# Altium PCB PCB.PcbDoc (part 1 of 6)
Units mm, origin at the board's own origin, x right, y up, seen from the top; angles counter-clockwise.
Board outline 56.61 x 57.68 mm, 2 copper layers (Top Layer, Bottom Layer), stack 0.572 mm thick; 104 components, 100 nets, 551 pads, 332 vias.
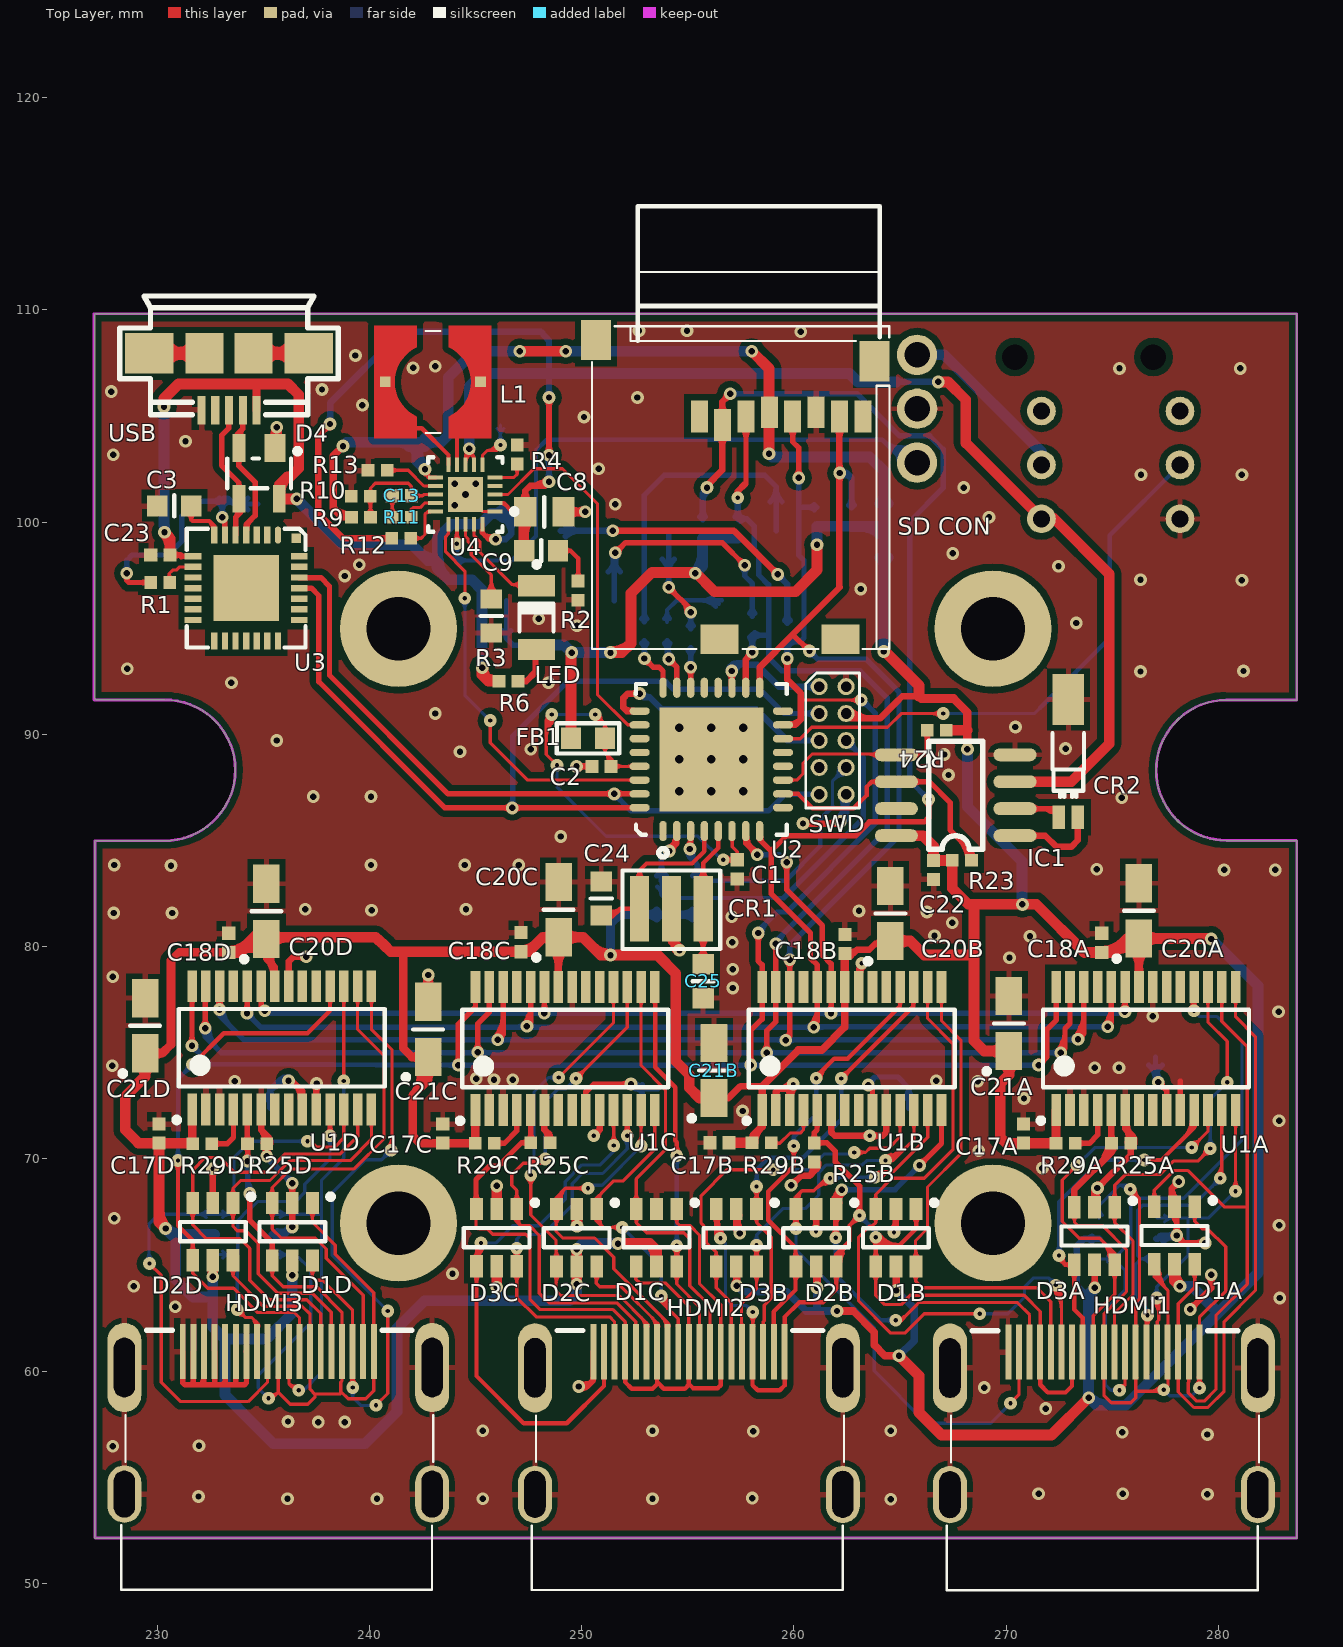
[diagram p0: Top Layer view]
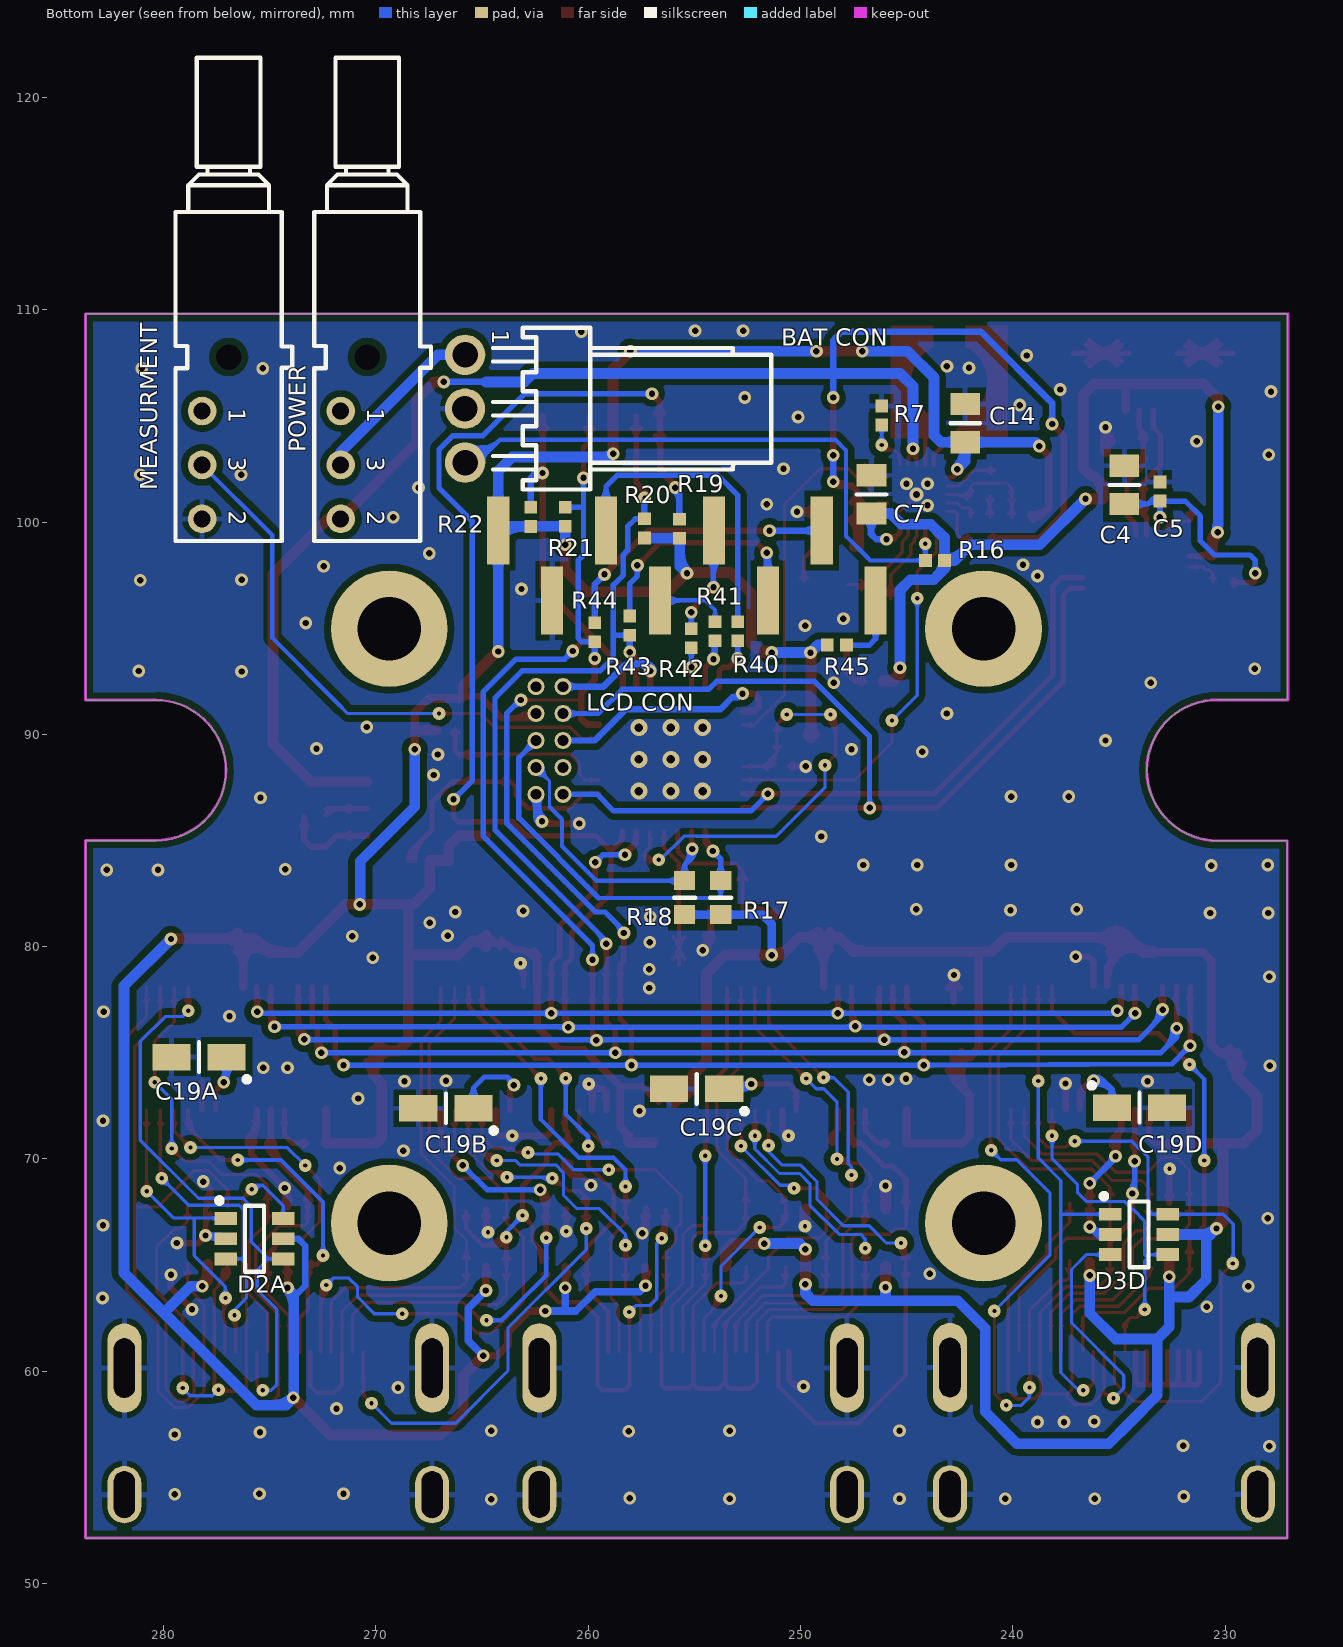
[diagram p1: Bottom Layer view, seen from below]
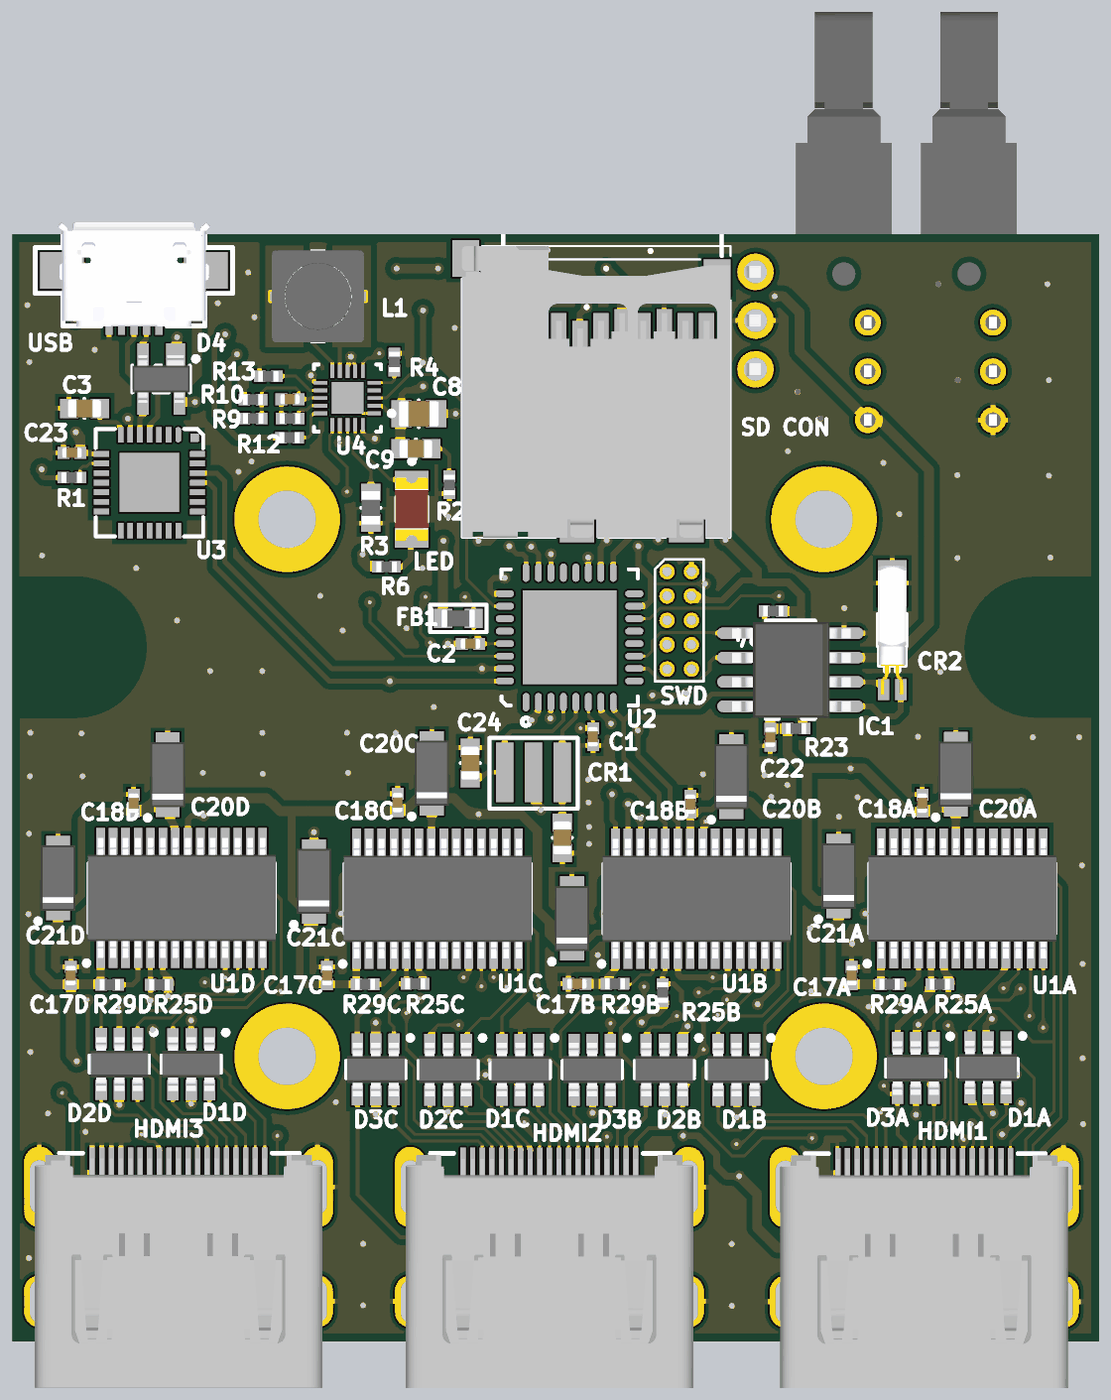
[diagram p7: 3D render of the assembled board from above, using the file's embedded part models]
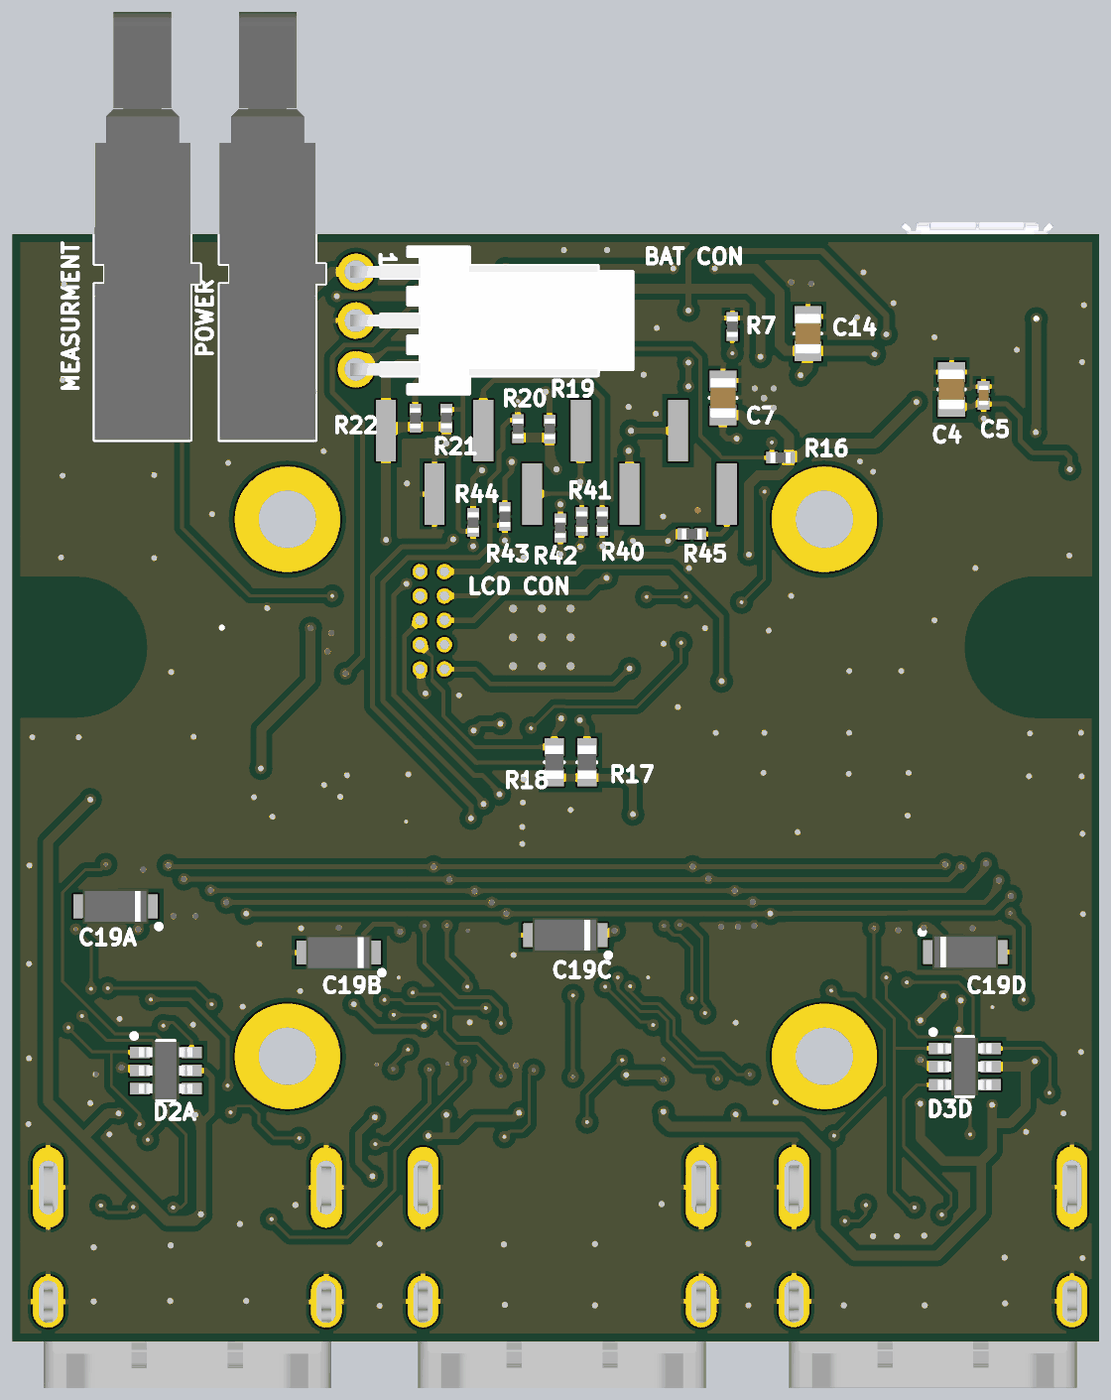
[diagram p8: 3D render of the assembled board from below, using the file's embedded part models]

## Layer stack, top to bottom
Top Layer: signal copper 0.036
Dielectric: core 0.5, FR-4, Dk 4.8
Bottom Layer: signal copper 0.036

## Board outline
227.07,52.13 227.07,84.97 227.09,84.99 230.35,84.99 ccw(c230.352,88.328) 233.69,88.325 ccw(c230.383,88.317) 230.375,91.625 227.125,91.625 227.07,91.68 227.07,109.81 283.67,109.81 283.68,109.8 283.68,91.62 280.37,91.62 ccw(c280.38,88.305) 277.065,88.295 ccw(c280.366,88.296) 280.368,84.995 283.67,84.995 283.68,84.985 283.68,52.145

## Design rules (kind name [scope] priority, off if disabled: settings)
Clearance Clearance_poly [(InPolygon)] p1: gap=0.305
Clearance [All] p2: gap=0.152
DiffPairsRouting [All] p1: maxlimit=0.508 minlimit=0.381 mostfreqgap=0.432 maxuncoupledlength=12.7
HoleSize [All] p1: absolutevalues=TRUE maxlimit=3 minlimit=0.025 maxpercent=80.000 minpercent=20.000
MinimumSolderMaskSliver [All] p1: minsoldermaskwidth=0
MinimumSolderMaskSliver SilkscreenOverComponentPads [All] p2: minsoldermaskwidth=0.254
PlaneClearance [All] p1: clearance=0.203
PlaneConnect PlaneConnect_pad [(InPadClass('All Pads'))] p1: planeconnectstyle=Relief reliefexpansion=0.508 reliefentries=4 reliefconductorwidth=0.254 reliefairgap=0.254
PlaneConnect [All] p2: planeconnectstyle=Direct reliefexpansion=0.508 reliefentries=4 reliefconductorwidth=0.254 reliefairgap=0.254
PolygonConnect PolygonConnect_pad [(InPadClass('All Pads'))] p1: connectstyle=Relief reliefconductorwidth=0.254 reliefentries=4 polygonreliefangle="90 Angle"
PolygonConnect [All] p2: connectstyle=Direct reliefconductorwidth=0.254 reliefentries=4 polygonreliefangle="90 Angle"
RoutingVias [All] p1: holewidth=0.2 width=0.5 viastyle="Through Hole" minholewidth=0.2 minwidth=0.5 maxholewidth=0.5 maxwidth=1
SilkToSilkClearance [All] p1: silktosilkclearance=0
SilkscreenOverComponentPads SilkToSolderMaskClearance [IsPad] p1: minsilkscreentomaskgap=0.254
SolderMaskExpansion [All] p1: expansion=0.102
TestPointUsage FabricationTestPointUsage [All] p1: valid=0 allowmultiple=FALSE
Testpoint FabricationTestpoint [All] p1: side=3 testpointundercomponent=TRUE minsize=1.016 maxsize=2.54 preferedsize=1.524 minholesize=0 maxholesize=1.016 preferedholesize=0.813 testpointgrid=0.025 style=297 order=0-112345678
ViasUnderSMD [All] p1: allowed=FALSE
Width Width_1 [(InDifferentialPairClass('All Differential Pairs'))] p1: maxlimit=0.762 minlimit=0.203 preferedwidth=0.203
Width [All] p2: maxlimit=0.762 minlimit=0.152 preferedwidth=0.254
17 further rules are at their usual default settings.

## Classes and differential pairs
channel class ADCs: ADC1 ADC2 ADC3 ADC4
component class Procesor: C1 C2 C3 C4 C5 C22 C23 C24 C25 CR1 CR2 D4 FB1 HDMI1 HDMI2 HDMI3 IC1 "LCD CON" MEASURMENT R1 R17 R18 R19 R20 R21 R22 R23 R24 R40 R41 R42 R43 R44 R45 "SD CON" SW1 SWD U2 U3
component class U1_A: C17A C18A C19A C20A C21A D1A D2A D3A R25A R29A U1A
component class U1_B: C17B C18B C19B C20B C21B D1B D2B D3B IC?_U_ADCs2 R25B R29B U1B
component class U1_C: C17C C18C C19C C20C C21C D1C D2C D3C R25C R29C U1C
component class U1_D: C17D C18D C19D C20D C21D D1D D2D D3D R25D R29D U1D
component class U_Zasilanie: "BAT CON" C7 C8 C9 C13 C14 L1 LED POWER R2 R3 R4 R6 R7 R9 R10 R11 R12 R13 R16 R4242 R231123 R? U4 USB

## Components (designator, comment, footprint, x,y, rotation, side; value= is the part's Value field where it differs from the comment)
"BAT CON" "KK®" MOLEX_22-05-7038 265.8,105.34 r270 bottom
C1 "100n" CAPC1005X55N 257.327,83.642 r90 top
C2 "100n" CAPC1005X55N 250.934,88.494 r0 top
C3 "1u" CAPC1608X87N 230.81,100.762 r180 top
C4 "10u" CAPC2012X135N 234.747,101.752 r270 bottom
C5 "100n" CAPC1005X55N 233.07,101.44 r90 bottom
C7 "10u" CAPC2012X135N 246.659,101.306 r90 bottom
C8 "10u" CAPC2012X135N 248.245,100.482 r0 top
C9 "4.7u" CAPC1608X87N 248.094,98.654 r0 top
C13 "150p" CAPC1005X55N 241.529,101.244 r180 top
C14 "10u" CAPC2012X135N 242.24,104.659 r90 bottom
C17A "100n" CAPC1005X55N 270.815,71.196 r270 top (schematic designator C17)
C17B "100n" CAPC1005X55N 256.489,70.764 r0 top (schematic designator C17)
C17C "100n" CAPC1005X55N 243.459,71.196 r270 top (schematic designator C17)
C17D "100n" CAPC1005X55N 230.099,71.196 r270 top (schematic designator C17)
C18A "100n" CAPC1005X55N 274.498,80.181 r270 top (schematic designator C18)
C18B "100n" CAPC1005X55N 262.407,80.13 r270 top (schematic designator C18)
C18C "100n" CAPC1005X55N 247.142,80.213 r270 top (schematic designator C18)
C18D "100n" CAPC1005X55N 233.375,80.181 r270 top (schematic designator C18)
C19A "10u" CAPMP3216X180N 278.333,74.803 r0 bottom (schematic designator C19)
C19B "10u" CAPMP3216X180N 266.705,72.39 r0 bottom (schematic designator C19)
C19C "10u" CAPMP3216X180N 254.889,73.304 r0 bottom (schematic designator C19)
C19D "10u" CAPMP3216X180N 234.031,72.415 r180 bottom (schematic designator C19)
C20A "10u" CAPMP3216X180N 276.25,81.691 r90 top (schematic designator C20)
C20B "10u" CAPMP3216X180N 264.541,81.564 r90 top (schematic designator C20)
C20C "10u" CAPMP3216X180N 248.92,81.742 r90 top (schematic designator C20)
C20D "10u" CAPMP3216X180N 235.153,81.666 r90 top (schematic designator C20)
C21A "10u" CAPMP3216X180N 270.129,76.382 r90 top (schematic designator C21)
C21B "10u" CAPMP3216X180N 256.235,74.168 r90 top (schematic designator C21)
C21C "10u" CAPMP3216X180N 242.773,76.103 r90 top (schematic designator C21)
C21D "10u" CAPMP3216X180N 229.438,76.276 r90 top (schematic designator C21)
C22 "100n" CAPC1005X55N 266.573,83.617 r270 top
C23 "100n" CAPC1005X55N 230.157,98.45 r180 top
C24 "18p" CAPC1608X87N 250.927,82.271 r270 top
C25 "18p" CAPC1608X87N 255.727,78.372 r90 top
CR1 "QDCV12M00" CERAMIC_RES_QDCV 257.729,81.788 r0 top
CR2 "32.768kHz" XTAL_MICRO-CRYSTAL_MS3V-T1R 272.925,89.2 r0 top
D1A "WWS05-4RUL" SOT23-6 277.927,66.396 r270 top (schematic designator D1)
D1B "WWS05-4RUL" SOT23-6 264.805,66.29 r270 top (schematic designator D1)
D1C "WWS05-4RUL" SOT23-6 253.528,66.29 r270 top (schematic designator D1)
D1D "WWS05-4RUL" SOT23-6 236.372,66.573 r270 top (schematic designator D1)
D2A "WWS05-4RUL" SOT23-6 275.721,66.243 r180 bottom (schematic designator D2)
D2B "WWS05-4RUL" SOT23-6 261.046,66.29 r270 top (schematic designator D2)
D2C "WWS05-4RUL" SOT23-6 249.768,66.29 r270 top (schematic designator D2)
D2D "WWS05-4RUL" SOT23-6 232.628,66.577 r270 top (schematic designator D2)
D3A "WWS05-4RUL" SOT23-6 274.157,66.374 r270 top (schematic designator D3)
D3B "WWS05-4RUL" SOT23-6 257.287,66.29 r270 top (schematic designator D3)
D3C "WWS05-4RUL" SOT23-6 245.999,66.294 r270 top (schematic designator D3)
D3D "WWS05-4RUL" SOT23-6 234.057,66.446 r180 bottom (schematic designator D3)
D4 "PRTR5V0U2X" sot143b 234.758,102.343 r180 top
FB1 "100R@100MHz" 0603L 250.304,89.814 r0 top
HDMI1 "471510001" HDMI_471510001 274.6,62.209 r0 top
HDMI2 "471510001" HDMI_471510001 255.052,62.224 r0 top
HDMI3 "471510001" HDMI_471510001 235.711,62.235 r0 top
IC1 "DS1338Z-33+" SO-8 270.413,85.23 r180 top
L1 "2.2uH" IND_WURTH_WE-TPC_4828 242.99,106.604 r0 top
"LCD CON" "LCD5110" Goldpin1x8SMD 264.24,99.602 r180 bottom
LED "Red" LED_AVAGO_HSMC-C150 247.879,95.505 r270 top
MEASURMENT "Switch" SW_MENTOR_1850 276.936,107.772 r270 bottom
POWER "Switch" SW_MENTOR_1850 270.408,107.772 r270 bottom
R1 "10k" RESC1005X40N 230.149,97.155 r180 top
R2 "1" RESC1005X40N 249.834,96.774 r90 top
R3 "1.74k" RESC1608X55N 245.745,95.58 r90 top
R4 "10k" RESC1005X40N 246.964,103.182 r270 top
R6 "510" RESC1005X40N 246.558,92.507 r180 top
R7 "13k" RESC1005X40N 246.177,105.022 r270 bottom
R9 "620k" RESC1005X40N 239.605,100.228 r0 top
R10 "200k" RESC1005X40N 239.598,101.219 r180 top
R11 "15k" RESC1005X40N 241.529,100.228 r0 top
R12 "10k" RESC1005X40N 241.503,99.238 r0 top
R13 "10k" RESC1005X40N 240.393,102.438 r0 top
R16 "75k" RESC1005X40N 243.662,98.196 r180 bottom
R17 "10k" RESC1608X55N 253.76,82.31 r90 bottom
R18 "10k" RESC1608X55N 255.46,82.31 r90 bottom
R19 "10k" RESC1005X40N 255.702,99.688 r90 bottom
R20 "10k" RESC1005X40N 257.353,99.702 r90 bottom
R21 "10k" RESC1005X40N 261.087,100.254 r90 bottom
R22 "10k" RESC1005X40N 262.712,100.247 r90 bottom
R23 "10k" RESC1005X40N 267.912,84.074 r0 top
R24 "10k" RESC1005X40N 266.725,90.195 r180 top
R25A "620R" RESC1005X40N 275.412,70.739 r180 top (schematic designator R25)
R25B "620R" RESC1005X40N 260.96,70.307 r90 top (schematic designator R25)
R25C "620R" RESC1005X40N 248.056,70.764 r180 top (schematic designator R25)
R25D "620R" RESC1005X40N 234.714,70.714 r180 top (schematic designator R25)
R29A "10k" RESC1005X40N 272.796,70.739 r180 top (schematic designator R29)
R29B "10k" RESC1005X40N 258.478,70.764 r180 top (schematic designator R29)
R29C "10k" RESC1005X40N 245.44,70.739 r180 top (schematic designator R29)
R29D "10k" RESC1005X40N 232.131,70.714 r180 top (schematic designator R29)
R40 "100R" RESC1005X40N 252.959,94.862 r90 bottom
R41 "100R" RESC1005X40N 254.025,94.862 r90 bottom
R42 "100R" RESC1005X40N 255.143,94.532 r90 bottom
R43 "100R" RESC1005X40N 258.039,95.123 r90 bottom
R44 "100R" RESC1005X40N 259.69,94.811 r90 bottom
R45 "100R" RESC1005X40N 248.285,94.209 r180 bottom
"SD CON" "CARD-MSDE208 or CARD-MSDE2068 or 5008730806" MSDE208 264.244,94.028 r180 top
SWD "GoldPin 5x2" CON_2x5_MINI 261.188,92.253 r270 top
U1A "ADS1248" SOP65P640X120-28N 276.581,75.209 r90 top (schematic designator U1)
U1B "ADS1248" SOP65P640X120-28N 262.725,75.2 r90 top (schematic designator U1)
U1C "ADS1248" SOP65P640X120-28N 249.225,75.2 r90 top (schematic designator U1)
U1D "ADS1248" SOP65P640X120-28N 235.875,75.239 r90 top (schematic designator U1)
U2 "LPC1114FHN33/302" HVQFN33_QFN127P600-8N 256.108,88.824 r90 top
U3 "CP2102" QFN28 234.199,96.889 r270 top
U4 "LTC3558" LTC3558nowe2 244.525,101.3 r180 top
USB "ESB2271101" USB_MICRO_ESB2271101 234.541,107.95 r0 top

## Footprints (in the part's own frame and the unit in brackets; to place one, negate y for a bottom-side part, rotate by r counter-clockwise, add the part's x,y. Pads: shape width x height; smd on the part's side, far side on the other; paste and mask are expansions set on the pad)
0603L [mm]
  rect 0.95x1 smd: 1(-0.8,0) 2(0.8,0)
  silkscreen extent -1.47,-0.71 1.47,0.71, body extent -0.87,-0.47 0.88,0.48, height 0.7
CAPC1005X55N [mm] "Chip Capacitor, Body 1.0x0.55mm, IPC Medium Density"
  rect 0.62x0.62 smd: 1(-0.45,0) 2(0.45,0)
  body extent -0.52,-0.27 0.53,0.28, height 0.55
CAPC1608X87N [mm] "Chip Capacitor, Body 1.6x0.8mm IPC Medium Density"
  rect 0.95x1 smd: 1(-0.8,0) 2(0.8,0)
  silkscreen extent 0,-0.5 0,0.5, body extent -0.87,-0.47 0.88,0.48, height 0.87
CAPC2012X135N [mm] "Chip Capacitor, Body 2.0x1.25mm, IPC Medium Density"
  rect 1.05x1.4 smd: 1(-0.9,0) 2(0.9,0)
  silkscreen extent 0,-0.7 0,0.7, body extent -1.05,-0.67 1.05,0.68, height 1.25
CAPMP3216X180N [mm] "Capacitor, Polarized, Molded  Body 3.2x1.6mm, IPC Medium Density"
  rect 1.8x1.25 smd: 1(-1.3,0) 2(1.3,0)
  silkscreen extent -2.37,-0.7 0,1.17, body extent -1.7,-0.9 1.7,0.9, height 1.6
CERAMIC_RES_QDCV [mm] "SMD ceramic resonator"
  rect 0.9x3.1 smd: 1(-5,0) 2(-3.5,0) 3(-2,0)
  silkscreen extent -5.8,-1.9 -1.2,1.8
CON_2x5_MINI [mm] "1.27 dual goldpin"
  round 0.8 hole 0.5: 1(0,0) 2(0,1.27) 3(1.27,0) 4(1.27,1.27) 5(2.54,0) 6(2.54,1.27) 7(3.81,0) 8(3.81,1.27) 9(5.08,0) 10(5.08,1.27)
  silkscreen extent -0.64,-0.64 5.71,1.91, body extent -0.64,-0.64 5.71,1.91, height 0.7
Goldpin1x8SMD [mil]
  rect 41x126 smd: 1(0,0) 2(100,-130) 3(200,0) 4(300,-130) 5(400,0) 6(500,-130) 7(600,0) 8(700,-130)
HDMI_471510001 [mm]
  rect 0.28x2.6 smd: 1(4.5,-1.3) 2(4,-1.3) 3(3.5,-1.3) 4(3,-1.3) 5(2.5,-1.3) 6(2,-1.3) 7(1.5,-1.3) 8(1,-1.3) 9(0.5,-1.3) 10(0,-1.3) 11(-0.5,-1.3) 12(-1,-1.3) 13(-1.5,-1.3) 14(-2,-1.3) 15(-2.5,-1.3) 16(-3,-1.3) 17(-3.5,-1.3) 18(-4,-1.3) 19(-4.5,-1.3)
  oval 1.6x4.2 hole 1 slot 2.8 at 90 deg: 20(7.25,-2.06) 21(-7.25,-2.06)
  oval 1.6x2.7 hole 1 slot 2.2 at 90 deg: 22(-7.25,-8.02) 23(7.25,-8.02)
  silkscreen extent -7.4,-12.52 7.3,-0.3, body extent -7.5,-12.53 7.5,-0.38, height 6.25
HVQFN33_QFN127P600-8N [mm]
  oval 0.95x0.35 smd: 1(-3.375,2.275) 2(-3.375,1.625) 3(-3.375,0.975) 4(-3.375,0.325) 5(-3.375,-0.325) 6(-3.375,-0.975) 7(-3.375,-1.625) 8(-3.375,-2.275) 17(3.375,-2.275) 18(3.375,-1.625) 19(3.375,-0.975) 20(3.375,-0.325) 21(3.375,0.325) 22(3.375,0.975) 23(3.375,1.625) 24(3.375,2.275)
  oval 0.35x0.95 smd: 9(-2.275,-3.375) 10(-1.625,-3.375) 11(-0.975,-3.375) 12(-0.325,-3.375) 13(0.325,-3.375) 14(0.975,-3.375) 15(1.625,-3.375) 16(2.275,-3.375) 25(2.275,3.375) 26(1.625,3.375) 27(0.975,3.375) 28(0.325,3.375) 29(-0.325,3.375) 30(-0.975,3.375) 31(-1.625,3.375) 32(-2.275,3.375)
  rect 4.9x4.9 smd: 33(0,0)
  silkscreen extent -4.6,-3.55 3.55,3.55, body extent -3.55,-3.55 3.55,3.55, height 1
IND_WURTH_WE-TPC_4828 [mm] "Shielded Tiny Power Inductor, Body 4.8x4.8mm"
  rect 0.5x0.5 smd: 1(-2.247,0) 2(2.247,0)
  Top Layer region: 0.75,-2.65 2.75,-2.65 2.75,2.65 0.75,2.65 0.75,1.636 1.394,1.138 1.753,0.407 1.753,-0.407 1.394,-1.138 0.75,-1.636 0.75,-1.636
  Top Layer region: -2.75,-2.65 -0.75,-2.65 -0.75,-1.636 -1.394,-1.138 -1.753,-0.407 -1.753,0.407 -1.394,1.138 -0.75,1.636 -0.75,1.636 -0.75,2.65 -2.75,2.65
  silkscreen extent -0.35,-2.4 0.35,2.4, body extent -2.4,-2.4 2.4,2.4, height 2.8
LED_AVAGO_HSMC-C150 [mm] "Red Chip LED, 2-Leads, Body 3.2 x1.6mm, IPC Medium Density"
  rect 1x1.75 smd: 1(-1.5,0) 2(1.5,0)
  silkscreen extent -2.62,-0.8 0.65,0.8, body extent -1.65,-0.85 1.65,0.85, height 1.2
LTC3558nowe2 [mm]
  rect 0.7x0.2 smd: 1(-1.4,0.8) 2(-1.4,0.4) 3(-1.4,0) 4(-1.4,-0.4) 5(-1.4,-0.8) 11(1.4,-0.8) 12(1.4,-0.4) 13(1.4,0) 14(1.4,0.4) 15(1.4,0.8)
  rect 0.2x0.7 smd: 6(-0.8,-1.4) 7(-0.4,-1.4) 8(0,-1.4) 9(0.4,-1.4) 10(0.8,-1.4) 16(0.8,1.4) 17(0.4,1.4) 18(0,1.4) 19(-0.4,1.4) 20(-0.8,1.4)
  rect 1.65x1.65 smd: 21(0,0)
  silkscreen extent -2.43,-1.75 1.75,1.75, body extent 0,0 0,0, height 0.8
MOLEX_22-05-7038 [mm] "2.54mm (.100\") Pitch KK® Wire-To-Board Header, Right Angle, With Friction Lock, 3 Circuits"
  round 1.9 hole 1.2: 1(-2.54,0) 2(0,-0.005) 3(2.54,0)
  silkscreen extent -3.81,1.31 3.81,14.42, body extent -3.81,-0.32 3.81,14.42, height 5.84
MSDE208 [mm]
  rect 0.8x1.5 smd: 1(8.7,-10.95) 2(7.6,-10.55) 3(6.5,-10.95) 4(5.4,-11.15) 5(4.3,-10.95) 6(3.2,-11.15) 7(2.1,-10.95) 8(1,-10.95)
  rect 1.8x1.4 smd: CD(7.75,-0.45) ""(2.05,-0.45)
  rect 1.4x1.9 smd: COM(0.45,-13.55) COM(13.564,-14.55)
  silkscreen extent -0.25,-20.85 13.75,0, body extent -0.25,-15.2 13.75,0, height 1.9
QFN28 [mm]
  rect 3.1x3.1 smd: 0(-0.011,0.001)
  oval 0.8x0.3 smd: 1(-2.5,1.5)
  rect 0.8x0.3 smd: 2(-2.5,1) 3(-2.5,0.5) 4(-2.5,0) 5(-2.5,-0.5) 6(-2.5,-1) 7(-2.5,-1.5) 15(2.5,-1.5) 16(2.5,-1) 17(2.5,-0.5) 18(2.5,0) 19(2.5,0.5) 20(2.5,1) 21(2.5,1.5)
  rect 0.3x0.8 smd: 8(-1.5,-2.5) 9(-1,-2.5) 10(-0.5,-2.5) 11(0,-2.5) 12(0.5,-2.5) 13(1,-2.5) 14(1.5,-2.5) 22(1.5,2.5) 23(1,2.5) 24(0.5,2.5) 25(0,2.5) 26(-0.5,2.5) 27(-1,2.5) 28(-1.5,2.5)
  rect 0.435x0.435 smd: 29(-2.348,2.364)
  silkscreen extent -2.8,-2.8 2.8,2.8, body extent -2.8,-2.8 2.8,2.8, height 1
RESC1005X40N [mm] "Chip Resistor, EIA 0402, Metric 1005, Body 1.0x0.5mm, IPC Medium Density"
  rect 0.6x0.6 smd: 1(-0.45,0) 2(0.45,0)
  body extent -0.52,-0.27 0.53,0.28, height 0.4
RESC1608X55N [mm] "Chip Resistor, EIA 0603, Metric 1608, Body 1.6x0.8mm, IPC Medium Density"
  rect 0.9x1 smd: 1(-0.8,0) 2(0.8,0)
  silkscreen extent 0,-0.5 0,0.5, body extent -0.87,-0.47 0.88,0.48, height 0.55
SO-8 [mil]
  oval 80x24 smd: 1(0,0) 2(0,-50) 3(0,-100) 4(0,-150) 5(220,-150) 6(220,-100) 7(220,-50) 8(220,0)
  silkscreen extent 60,-175 160,25, body extent -14,-173 230,24, height 69
SOP65P640X120-28N [mm] "SOP, 0.65mm Pitch; 28 Pin, 4.40mm W X 9.70mm L X 1.20mm H body, IPC Medium Density"
  rect 1.5x0.45 smd: 1(-2.9,4.225) 2(-2.9,3.575) 3(-2.9,2.925) 4(-2.9,2.275) 5(-2.9,1.625) 6(-2.9,0.975) 7(-2.9,0.325) 8(-2.9,-0.325) 9(-2.9,-0.975) 10(-2.9,-1.625) 11(-2.9,-2.275) 12(-2.9,-2.925) 13(-2.9,-3.575) 14(-2.9,-4.225) 15(2.9,-4.225) 16(2.9,-3.575) 17(2.9,-2.925) 18(2.9,-2.275) 19(2.9,-1.625) 20(2.9,-0.975) 21(2.9,-0.325) 22(2.9,0.325) 23(2.9,0.975) 24(2.9,1.625) 25(2.9,2.275) 26(2.9,2.925) 27(2.9,3.575) 28(2.9,4.225)
  silkscreen extent -3.52,-4.85 1.83,5.07, body extent -3.12,-4.9 3.12,4.9, height 1.2
SOT23-6 [mm]
  rect 1.05x0.6 smd: 1(-1.35,0.95) 2(-1.35,0) 3(-1.35,-0.95) 4(1.35,-0.95) 5(1.35,0) 6(1.35,0.95)
  silkscreen extent -1.77,-1.55 0.45,1.92, body extent -1.4,-1.5 1.4,1.5, height 1.45
sot143b [mm]
  rect 1x1.3 smd: 1(-0.8,-1.149)
  rect 0.6x1.3 smd: 2(0.9,-1.149) 3(0.9,1.251) 4(-1,1.251)
  silkscreen extent -1.99,-1.12 1.45,0.75, body extent -1.55,-1.2 1.45,1.3, height 1.1
SW_MENTOR_1850 [mm] "SPDT Switch - PCB Edge Mounting - MENTOR_1850"
  round 1.35 hole 0.8: 1(2.54,-1.25) 2(7.62,-1.25) 3(5.08,-1.25)
  round 1 hole 1.2 unplated: 4(0,0)
  silkscreen extent -14.1,-2.5 8.66,3, body extent -13.65,-2.5 8.66,3, height 9.95
USB_MICRO_ESB2271101 [mm]
  rect 2.286x1.905 smd: 0(-4.9,0) 0c(2.6,0)
  rect 1.778x1.905 smd: 0a(-2.3,0) 0b(0,0)
  rect 0.381x1.35 smd: 1(0.15,-2.675) 2(-0.5,-2.675) 3(-1.15,-2.675) 4(-1.8,-2.675) 5(-2.45,-2.675)
  silkscreen extent -6.3,-2.9 3.99,2.7, body extent -5.13,-2.92 2.85,2.51, height 2.72
XTAL_MICRO-CRYSTAL_MS3V-T1R [mm] "2 Pins, 1.4 x 5.2 x 1.4mm , SMD Crystal, MS3V-T1R Serie"
  rect 0.6x1.1 smd: 1(-0.45,-3.1) 2(0.45,-3.1)
  rect 1.5x2.4 smd: 3(0,2.45)
  silkscreen extent -0.74,-2.15 0.74,0.85, body extent -0.74,-3.35 0.74,3.35, height 1.48

## Part data
"BAT CON": library part MOLEX_22-05-7038, "Connector 3 Male"
C1 C2: library part CC0402_100NF_16V_10%_X7R, "Non-polarised capacitor"
C3: library part CC0603_1UF_16V_10%_X7R, "Non-polarised capacitor"
C4 C7 C8 C14: library part CC0805_10UF_16V_10%_X5R, "Non-polarised capacitor"
C5 C17A C17B C17C C17D C18A C18B C18C C18D C22 C23: library part "Capacitor - non polarized", "Non-polarised capacitor"
C9: library part CC0603_4.7UF_6.3V_10%_X5R, "Non-polarised capacitor"
C13: library part CC0402_150PF_50V_5%_NP0, "Non-polarised capacitor"
C19A C19B C19C C19D C20A C20B C20C C20D C21A C21B C21C C21D: library part CTE7343-31_10UF_25V_10%, "Polarised capacitor"
C24 C25: library part CC0603_18PF_50V_5%_NP0, "Non-polarised capacitor"
CR1: library part X_CERAMIC_RES, "ceramic resonator QCC(QDCV)12.00 (Maritex)"
CR2: library part "XTAL_32.768 KHZ_MICRO-CRYSTAL_MS3V-T1R 32.768 KHZ 12.5PF 20PPM", "Crystal 3 pins 1=XTAL 2=XTAL 3=GND"
D1A D1B D1C D1D D2A D2B D2C D2D D3A D3B D3C D3D: library part D_TVS_WWS05-4RUL, "TVS, 5V"
D4: library part D_TVS_PRTR5V0U2X, "dual 5.5 ESD transient voltage suppressor"
FB1: library part L_FERRITE_BEAD, "ferrite bead"
HDMI1 HDMI2 HDMI3: library part CON_HDMI_OUT, "HDMI connector with flante (Multicomp, Farnell)"
IC1: library part RTC_DS1338U-33, "RTC"
L1: library part IND_2.2UH_30%_WURTH_WE-TPC_7440430022, "Inductor With Magnetic core"
LED: library part LED_AVAGO_HSMC-C150, "LED Red 1C 2A"
MEASURMENT POWER: library part SW_MENTOR_1850.1031, "SPDT Switch"
R1 R4 R11 R12 R13 R21 R29A R29B R29C R29D: library part R0402_10K_1%_0.0625W_100PPM, "Resistor - 1%"
R2: library part R0402_1R_1%_0.0625W_200PPM, "Resistor - 1%"
R3: library part R0603_1K74_0.1%_0.063W_10PPM, "Resistor - 0.1%"
R6: library part R0402_510R_1%_0.0625W_100PPM, "Resistor - 1%"
R7: library part R0402_13K_1%_0.0625W_100PPM, "Resistor - 1%"
R9 R25A R25B R25C R25D: library part R0402_620R_1%_0.0625W_100PPM, "Resistor - 1%"
R10: library part R0402_200K_1%_0.0625W_100PPM, "Resistor - 1%"
R16: library part R0402_75K_1%_0.0625W_100PPM, "Resistor - 1%"
R17 R18: library part R0603_10K_1%_0.1W_100PPM, "Resistor - 1%"
R19 R20 R22 R23 R24: library part "Resistor - 1%", "Resistor - 1%"
R40 R41 R42 R43 R44 R45: library part R0402_10R_1%_0.0625W_200PPM, "Resistor - 1%"
"SD CON": library part CON_CARD_microSD_push-push, "Secure Digital Cards socket (Maritex)"
SWD: library part "HEADER 5X2"
U1A U1B U1C U1D: library part ADS1248IPWR, "24-Bit Analog-to-Digital Converter for Temperature Sensors"
U2: library part UPC_LPC1111
U4: "USB Buck-Boost Charger"
USB: library part CON_USB_AB_MICRO, "USB micro AB connector"

## Free pads (board coordinates)
  round 5.5 hole 3: 0(269.375,66.98) 1(269.375,94.98) 2(241.375,94.98) 3(241.375,66.98)

## Via types
v1: diameter 0.6, hole 0.3, Top Layer to Bottom Layer, tented both sides, 242 vias
v2: diameter 0.6, hole 0.2, Top Layer to Bottom Layer, tented both sides, 80 vias
v3: diameter 0.8, hole 0.4, Top Layer to Bottom Layer, tented both sides, 9 vias
v4: diameter 0.66, hole 0.33, Top Layer to Bottom Layer, tented both sides, 1 vias

## Nets (pads, with @x,y where several pads share a name; then routed paths per layer and width w, separated by ;. In a path a pad name is that pad's centre, name@x,y a point inside that pad or via, vN(x,y) a via of type N, cw(c..) or ccw(c..) an arc to the next point about the centre after c; other vN are vias at no path point)
+3V3: "LCD CON.1" "SD CON.4" C14.1 C17A.2 C17B.2 C17C.2 C17D.2 C18A.2 C18B.2 C18C.2 C18D.2 C20A.1 C20B.1 C20C.1 C20D.1 C21A.1 C21B.1 C21C.1 C21D.1 C22.1 D1A.5 D1B.5 D1C.5 D1D.5 D2A.5 D2B.5 D2C.5 D2D.5 D3A.5 D3B.5 D3C.5 D3D.5 FB1.1 IC1.8 R9.1 R17.1 R18.1 R19.1 R20.1 R21.1 R22.1 R23.1 R24.1 R29A.2 R29B.2 R29C.2 R29D.2 R45.1 SWD.4 U1A.1 U1A.22 U1B.1 U1B.22 U1C.1 U1C.22 U1D.1 U1D.22 U4.11 | length 486.4
  Top Layer w0.203: v1@242.621,102.286 U4.11@242.807,102.1 ; 242.754,102.191 ccw(c242.927,102.291) U4.11@242.875,102.098 ; v1@242.792,102.389 ccw(c242.985,102.276) U4.11@242.827,102.118 ; U4.11@243.125,102.1 U4.11@242.807,102.1 ; U4.11@242.807,102.1 cw(c242.958,102.251) 242.783,102.375 ccw(c242.958,102.251) U4.11@242.807,102.1 ; U4.11@242.875,102.098 cw(c242.875,102.261) 242.761,102.146 ccw(c242.875,102.261) U4.11@242.875,102.098
  Top Layer w0.254: v1@242.621,102.286 v1(242.621,102.489)
  Top Layer w0.305: C20D.1@235.153,80.366 235.153,79.426 ; U1D.22@235.55,78.139 235.55,79.029 ; C21B.1@256.235,72.868 256.916,72.868 ; 257.48,70.764 R29B.2@258.028,70.764 ; 258.5,73.436 257.484,73.436 256.916,72.868 ; SWD.4@262.458,90.983 262.687,90.754 264.058,90.754 264.808,91.504 ; C18B.2@262.555,79.827 C18B.2@262.407,79.68 262.797,79.68 262.974,79.858 ; SWD.4@262.632,90.806 cw(c262.924,90.51) 263.132,90.87 ; C20B.1@264.541,80.264 264.414,80.137 263.827,80.137 ; 264.897,91.592 264.808,91.504 ; 265.887,91.796 265.1,91.796 264.808,91.504 ; v1(274.168,63.932) D3A.5@274.168,65.014 ; 235.153,79.426 ccw(c234.922,79.426) 234.998,79.644 cw(c234.922,79.426) 235.153,79.426 ; 235.153,79.426 cw(c235.384,79.426) 235.308,79.644 ccw(c235.384,79.426) 235.153,79.426 ; 235.153,79.426 235.55,79.029 ; 235.55,79.029 cw(c235.949,79.427) 235.516,79.788 ccw(c235.949,79.427) 235.55,79.029 ; 256.916,72.868 ccw(c256.916,72.613) 256.678,72.703 cw(c256.916,72.613) 256.916,72.868 ; 256.916,72.868 cw(c256.916,73.123) 256.678,73.033 ccw(c256.916,73.123) 256.916,72.868 ; 257.671,70.764 ccw(c257.671,71.121) 257.923,70.869 cw(c257.671,71.121) 257.671,70.764 ; 257.671,70.764 cw(c257.671,70.408) 257.923,70.66 ccw(c257.671,70.408) 257.671,70.764 ; 262.788,79.68 ccw(c262.788,79.299) 262.519,79.568 cw(c262.788,79.299) 262.788,79.68 ; 262.788,79.68 cw(c262.788,80.06) 262.519,79.791 ccw(c262.788,80.06) 262.788,79.68 ; 262.974,79.858 cw(c262.706,80.126) 262.495,79.811 ccw(c262.706,80.126) 262.974,79.858 ; 262.974,79.858 263.548,79.858 263.827,80.137 ; 263.827,80.137 ccw(c263.827,80.389) 264.076,80.346 cw(c263.827,80.389) 263.827,80.137 ; 263.827,80.137 cw(c263.827,79.699) 264.17,79.971 ccw(c263.827,79.699) 263.827,80.137 ; 274.168,64.288 ccw(c274.524,64.288) 274.272,64.036 cw(c274.524,64.288) 274.168,64.288 ; 274.168,64.288 cw(c273.811,64.288) 274.063,64.036 ccw(c273.811,64.288) 274.168,64.288 ; 235.169,79.41 cw(c234.423,78.664) 235.478,78.664 ccw(c234.423,78.664) 235.169,79.41 ; C20D.1@235.282,79.983 ccw(c235.692,79.642) 235.314,79.265 cw(c235.692,79.642) C20D.1@235.282,79.983 ; C18B.2@262.325,79.558 ccw(c262.496,79.812) 262.712,79.595 cw(c262.496,79.812) C18B.2@262.325,79.558 ; SWD.4@262.418,90.942 ccw(c262.872,91.397) 262.872,90.754 cw(c262.872,91.397) SWD.4@262.418,90.942 ; SWD.4@262.633,91.158 ccw(c263.608,92.132) 263.608,90.754 cw(c263.608,92.132) SWD.4@262.633,91.158 ; D3A.5@274.053,64.695 cw(c273.776,64.418) 274.168,64.418 ccw(c273.776,64.418) D3A.5@274.053,64.695 ; 274.168,64.467 cw(c274.489,64.467) 274.262,64.695 ccw(c274.489,64.467) 274.168,64.467
  Top Layer w0.356: 238.606,100.449 cw(c238.48,99.763) R9.1@239.055,100.159 ; v1(238.76,103.581) 238.303,103.124 238.303,100.66 ; R9.1@239.13,100.254 238.709,100.254 238.303,100.66 ; U1C.22@248.9,78.1 C20C.1@248.9,80.422 ; v1(257.302,64.033) 257.312,64.044 D3B.5@257.312,64.94 ; R29B.2@257.967,70.87 ccw(c257.617,71.475) 258.292,71.294 ; R29B.2@258.078,70.739 258.078,71.109 ; v1(261.087,63.932) D2B.5@261.087,64.925 ; v1(262.026,62.84) 262.788,62.84 263.779,61.849 263.779,61.239 264.287,60.731 v1(264.947,60.731) ; U1B.22@262.4,78.1 262.4,76.218 261.315,75.133 260.198,75.133 258.5,73.436 U1B.1@258.5,72.3 258.5,71.531 258.078,71.109 ; v1(264.82,63.805) 264.831,63.815 D1B.5@264.831,64.94 ; 238.303,100.66 ccw(c239.06,101.417) 239.146,100.35 cw(c239.06,101.417) 238.303,100.66 ; 258.078,71.109 cw(c257.771,71.109) 257.955,70.862 ccw(c257.771,71.109) 258.078,71.109 ; 238.799,100.254 cw(c238.799,99.872) 239.069,100.142 ccw(c238.799,99.872) 238.799,100.254 ; C20C.1@248.604,79.851 cw(c247.888,79.134) 248.9,79.134 ccw(c247.888,79.134) C20C.1@248.604,79.851 ; 248.9,79.04 cw(c250.047,79.04) 249.236,79.851 ccw(c250.047,79.04) 248.9,79.04 ; D3B.5@257.2,64.629 cw(c256.93,64.359) 257.312,64.359 ccw(c256.93,64.359) D3B.5@257.2,64.629 ; v1@257.216,64.12 ccw(c256.982,64.353) 257.312,64.353 cw(c256.982,64.353) v1@257.216,64.12 ; R29B.2@258.15,70.764 cw(c259.154,70.764) 258.444,71.475 ccw(c259.154,70.764) R29B.2@258.15,70.764 ; D2B.5@260.96,64.629 cw(c260.653,64.322) 261.087,64.322 ccw(c260.653,64.322) D2B.5@260.96,64.629 ; D1B.5@264.719,64.629 cw(c264.449,64.359) 264.831,64.359 ccw(c264.449,64.359) D1B.5@264.719,64.629 ; v1@264.734,63.891 ccw(c264.501,64.124) 264.831,64.124 cw(c264.501,64.124) v1@264.734,63.891
  Top Layer w0.406: C21D.1@229.438,74.976 230.246,74.976 ; R29D.2@231.65,70.744 U1D.1@231.65,72.339 ; C18D.2@233.375,79.731 231.038,79.731 230.657,79.35 230.657,75.387 230.246,74.976 ; 241.605,79.763 241.605,75.209 242.011,74.803 ; 242.42,73.487 cw(c243.846,73.562) C21C.1@242.785,74.518 ; U1C.1@244.99,72.29 R29C.2@244.99,70.739 243.205,70.739 242.392,70.739 242.037,71.095 242.037,73 ; U1B.22@262.4,78.1 262.4,79.317 ; 265.994,91.689 267.518,91.689 268.173,91.034 v1(268.173,89.306) ; R29A.2@272.346,70.739 U1A.1@272.346,72.3 ; C20A.1@276.225,80.416 C20A.1@276.25,80.391 276.25,78.115 U1A.22@276.256,78.109 276.256,78.923 ; 230.246,74.976 ccw(c230.246,74.413) 229.784,74.735 cw(c230.246,74.413) 230.246,74.976 ; 230.246,74.976 cw(c230.246,75.54) 229.784,75.217 ccw(c230.246,75.54) 230.246,74.976 ; 242.011,74.803 ccw(c242.011,75.28) 242.416,75.027 cw(c242.011,75.28) 242.011,74.803 ; 242.011,74.803 cw(c242.011,74.326) 242.416,74.579 ccw(c242.011,74.326) 242.011,74.803 ; 242.011,74.803 C21C.1@242.773,74.803 242.773,73.736 ; 242.037,73 ccw(c241.064,73.972) 242.372,74.398 cw(c241.064,73.972) 242.037,73 ; 242.037,73 242.773,73.736 ; 242.773,73.736 ccw(c242.241,73.736) 242.538,74.178 cw(c242.241,73.736) 242.773,73.736 ; 242.773,73.736 cw(c243.305,73.736) 243.009,74.178 ccw(c243.305,73.736) 242.773,73.736 ; 276.25,79.098 ccw(c275.232,79.098) 275.952,79.818 cw(c275.232,79.098) 276.25,79.098 ; 276.25,79.098 cw(c277.269,79.098) 276.549,79.818 ccw(c277.269,79.098) 276.25,79.098 ; 231.65,71.02 ccw(c231.987,71.02) 231.749,70.782 cw(c231.987,71.02) 231.65,71.02 ; 242.505,73.468 ccw(c241.772,74.202) 242.759,74.523 cw(c241.772,74.202) 242.505,73.468
  Top Layer w0.508: C21D.1@229.438,74.976 229.438,73.889 ; C17D.2@230.099,70.746 C17D.2@230.099,70.739 ; v1(230.403,66.726) 230.099,67.031 C17D.2@230.099,70.739 ; R29D.2@231.655,70.739 C17D.2@230.099,70.739 ; v1(232.628,64.45) D2D.5@232.628,65.227 ; C18D.2@233.375,79.731 233.858,79.731 ; 234.493,80.366 233.858,79.731 ; C20D.1@234.569,80.442 236.042,80.442 ; v1(236.372,64.516) D1D.5@236.372,65.122 ; v1(245.999,63.957) D3C.5@245.999,64.944 ; v1(247.091,108.052) v1(249.25,108.052) ; FB1.1@249.504,89.814 249.504,93.828 v1(249.53,93.853) ; v1(249.768,64.099) D2C.5@249.768,64.94 v1(249.768,65.75) v1@249.788,65.75 ; v1(251.358,93.853) 251.892,93.853 252.324,94.285 ; v1(251.714,66.015) 253.213,66.015 ; D1C.5@253.528,64.94 253.528,65.7 253.213,66.015 ; C21B.1@256.235,72.868 255.554,72.868 ; C17B.2@256.939,70.764 R29B.2@258.028,70.764 ; v1(258.013,108.052) 258.826,107.239 v1(258.826,103.226) ; v1(261.087,98.933) 261.087,97.739 260.071,96.723 256.261,96.723 255.351,97.633 253.309,97.633 252.324,96.647 252.324,94.285 ; v1(264.236,93.904) 264.236,93.929 264.262,93.929 265.887,92.304 265.887,91.796 ; C20B.1@264.541,80.264 265.481,80.264 266.141,79.604 268.478,79.604 ; IC1.8@264.825,85.23 266.077,85.23 266.573,84.734 C22.1@266.573,84.067 R23.1@267.455,84.067 ; v1(264.947,60.731) 265.887,59.792 265.887,58.064 266.954,56.998 272.136,56.998 v1(273.888,58.75) ; R24.1@267.175,90.195 268.148,90.195 ; R23.1@267.462,84.074 267.462,82.753 268.211,82.004 268.478,82.004 ; v1@270.739,82.004 268.478,82.004 ; v1@270.764,82.004 271.412,82.004 273.685,79.731 C18A.2@274.498,79.731 275.057,79.731 ; R29A.2@272.346,70.739 270.002,70.739 269.723,71.018 269.723,73.558 270.129,73.965 ; D1A.5@277.927,65.046 277.927,64.262 v1(278.181,64.008) ; v1(279.654,80.366) 279.629,80.391 C20A.1@276.25,80.391 275.717,80.391 275.057,79.731 ; 229.438,73.889 ccw(c228.734,73.889) 229.195,74.421 cw(c228.734,73.889) 229.438,73.889 ; 229.438,73.889 cw(c230.143,73.889) 229.681,74.421 ccw(c230.143,73.889) 229.438,73.889 ; 229.438,73.889 228.498,72.949 228.498,71.374 229.133,70.739 C17D.2@230.099,70.739 ; 233.858,79.731 cw(c234.43,79.159) 234.926,79.798 ccw(c234.43,79.159) 233.858,79.731 ; 236.042,80.442 ccw(c236.042,79.706) 235.451,80.144 cw(c236.042,79.706) 236.042,80.442 ; 236.042,80.442 240.284,80.442 240.69,80.086 241.013,79.763 241.605,79.763 C18C.2@247.142,79.763 247.505,79.763 248.183,80.442 ; 248.183,80.442 ccw(c248.183,80.987) 248.622,80.663 cw(c248.183,80.987) 248.183,80.442 ; 248.183,80.442 cw(c248.183,79.896) 248.622,80.221 ccw(c248.183,79.896) 248.183,80.442 ; 248.183,80.442 C20C.1@248.92,80.442 250.063,80.442 250.901,79.604 v1(251.358,79.604) 253.568,79.604 254.432,78.74 254.432,74.6 255.067,73.965 255.067,73.355 255.554,72.868 ; 249.504,90.373 ccw(c250.038,90.373) 249.661,89.996 cw(c250.038,90.373) 249.504,90.373 ; 249.504,90.373 cw(c248.971,90.373) 249.348,89.996 ccw(c248.971,90.373) 249.504,90.373 ; 249.816,80.442 ccw(c249.816,79.546) 249.182,80.179 cw(c249.816,79.546) 249.816,80.442 ; 249.816,80.442 cw(c249.816,81.337) 249.182,80.704 ccw(c249.816,81.337) 249.816,80.442 ; 252.324,94.285 cw(c251.391,95.217) 251.36,93.899 ccw(c251.391,95.217) 252.324,94.285 ; 253.213,66.015 cw(c252.53,65.332) 253.482,65.173 ccw(c252.53,65.332) 253.213,66.015 ; 255.554,72.868 ccw(c255.554,73.308) 255.924,73.069 cw(c255.554,73.308) 255.554,72.868 ; 255.554,72.868 cw(c255.554,72.428) 255.924,72.667 ccw(c255.554,72.428) 255.554,72.868 ; 265.437,80.264 ccw(c265.437,79.368) 264.803,80.002 cw(c265.437,79.368) 265.437,80.264 ; 265.437,80.264 cw(c265.437,81.16) 264.803,80.526 ccw(c265.437,81.16) 265.437,80.264 ; 268.478,79.604 268.478,82.004 ; 268.478,79.604 268.478,75.565 268.961,75.082 C21A.1@270.129,75.082 270.129,73.965 ; 269.233,75.082 ccw(c269.233,75.978) 269.867,75.345 cw(c269.233,75.978) 269.233,75.082 ; 269.233,75.082 cw(c269.233,74.187) 269.867,74.82 ccw(c269.233,74.187) 269.233,75.082 ; 270.129,73.965 ccw(c269.358,73.965) 269.878,74.534 cw(c269.358,73.965) 270.129,73.965 ; 270.129,73.965 cw(c270.9,73.965) 270.38,74.534 ccw(c270.9,73.965) 270.129,73.965 ; 275.057,79.731 cw(c275.595,79.192) 276.036,79.813 ccw(c275.595,79.192) 275.057,79.731 ; 277.146,80.391 ccw(c277.146,79.495) 276.513,80.129 cw(c277.146,79.495) 277.146,80.391 ; 277.146,80.391 cw(c277.146,81.287) 276.513,80.653 ccw(c277.146,81.287) 277.146,80.391 ; 230.099,67.573 ccw(c231.25,67.573) 230.436,66.758 cw(c231.25,67.573) 230.099,67.573 ; C18D.2@233.375,79.787 ccw(c233.375,81.087) 234.295,80.167 cw(c233.375,81.087) C18D.2@233.375,79.787 ; 234.265,80.138 cw(c234.786,79.617) 235.237,80.199 ccw(c234.786,79.617) 234.265,80.138 ; C20D.1@234.672,80.545 cw(c235.142,80.076) 235.549,80.6 ccw(c235.142,80.076) C20D.1@234.672,80.545 ; C20D.1@235.416,80.628 ccw(c235.865,81.077) 235.865,80.442 cw(c235.865,81.077) C20D.1@235.416,80.628 ; C18C.2@247.142,79.819 ccw(c247.142,80.83) 247.857,80.115 cw(c247.142,80.83) C18C.2@247.142,79.819 ; 250.499,80.005 ccw(c251.358,80.864) 251.358,79.65 cw(c251.358,80.864) 250.499,80.005 ; C18A.2@274.498,79.787 ccw(c274.498,81.271) 275.547,80.221 cw(c274.498,81.271) C18A.2@274.498,79.787 ; 275.482,80.156 cw(c275.948,79.69) 276.33,80.228 ccw(c275.948,79.69) 275.482,80.156 ; D1A.5@277.927,64.732 ccw(c278.905,64.732) 278.213,64.041 cw(c278.905,64.732) D1A.5@277.927,64.732
  Bottom Layer w0.305: v1(238.76,103.581) v1@238.785,103.607 ; v1(274.168,63.932) 274.168,63.779 273.875,63.487 ; D2A.5@274.389,66.251 273.667,66.251 273.329,65.913 273.329,64.033 273.875,63.487 ; 273.876,63.487 ccw(c273.514,63.849) 274.021,63.913 cw(c273.514,63.849) 273.876,63.487 ; 273.771,66.251 cw(c273.771,65.869) 274.041,66.139 ccw(c273.771,65.869) 273.771,66.251 ; 273.808,66.251 ccw(c273.808,66.581) 274.041,66.348 cw(c273.808,66.581) 273.808,66.251
  Bottom Layer w0.356: v1(257.302,64.033) 257.581,63.754 259.664,63.754 260.579,62.84 v1(262.026,62.84) ; 261.087,62.865 v1(261.087,63.932) ; v1(264.82,63.805) 265.659,62.967 265.659,61.443 v1(264.947,60.731)
  Bottom Layer w0.406: v1(251.358,79.604) 251.358,80.594 ; 251.358,80.366 251.358,80.594 ; R17.1@253.76,81.51 251.791,81.51 251.358,81.077 251.358,80.594 ; R17.1@253.785,81.51 R18.1@255.46,81.51 ; 253.114,81.51 ccw(c253.114,82.105) 253.535,81.684 cw(c253.114,82.105) 253.114,81.51 ; 253.114,81.51 cw(c253.114,80.914) 253.535,81.335 ccw(c253.114,80.914) 253.114,81.51 ; 254.406,81.51 ccw(c254.406,80.914) 253.984,81.335 cw(c254.406,80.914) 254.406,81.51 ; 254.406,81.51 cw(c254.406,82.105) 253.984,81.684 ccw(c254.406,82.105) 254.406,81.51 ; 254.814,81.51 ccw(c254.814,82.105) 255.235,81.684 cw(c254.814,82.105) 254.814,81.51 ; 254.814,81.51 cw(c254.814,80.914) 255.235,81.335 ccw(c254.814,80.914) 254.814,81.51
  Bottom Layer w0.508: v1(230.403,66.726) 230.683,66.446 ; v1(232.628,64.45) 232.628,63.5 ; D3D.5@232.707,66.446 230.683,66.446 ; 234.671,57.404 234.505,57.569 ; v1(236.372,64.516) 236.372,62.738 235.153,61.519 233.197,61.519 ; v1(238.76,103.581) 238.938,103.759 C14.1@242.24,103.759 ; v1(242.621,102.489) 242.24,102.87 C14.1@242.24,103.759 ; 245.999,63.525 245.999,63.322 ; v1(245.999,63.957) 245.999,63.322 ; v1(247.091,108.052) 244.958,108.052 243.713,106.807 243.713,104.089 243.383,103.759 C14.1@242.24,103.759 ; R45.1@248.735,94.209 249.174,94.209 v1(249.53,93.853) v1(251.358,93.853) ; v1(249.25,108.052) v1(258.013,108.052) ; v1(249.768,64.099) 249.768,63.663 249.428,63.322 245.999,63.322 ; v1(249.768,65.75) 250.033,66.015 v1(251.714,66.015) ; v1(255.346,97.587) 255.693,97.933 255.693,99.229 R19.1@255.702,99.238 257.338,99.238 R20.1@257.353,99.252 ; v1(258.826,103.226) 258.978,103.073 263.576,103.073 264.24,102.409 264.24,99.602 ; v1(261.087,98.933) R21.1@261.087,99.804 R22.1@262.705,99.804 ; R22.1@262.712,99.797 264.045,99.797 264.24,99.602 ; v1(264.236,93.904) 264.236,95.246 ; 264.24,94.95 264.24,99.602 ; v1(268.173,89.306) 268.173,86.589 270.739,84.023 270.739,82.017 v1(270.764,81.991) ; 273.875,63.487 273.875,58.763 v1(273.888,58.75) 274.239,58.399 275.629,58.399 281.864,64.635 281.864,78.156 v1(279.654,80.366) ; v1(278.181,64.008) 278.74,64.008 279.925,62.823 ; 230.683,66.446 230.886,66.243 230.886,64.313 231.699,63.5 232.628,63.5 ; 232.628,63.5 232.628,62.088 233.197,61.519 ; 233.197,61.519 233.197,58.877 234.505,57.569 ; 234.505,57.569 235.483,56.591 239.801,56.591 241.3,58.09 241.3,62.027 242.595,63.322 245.999,63.322 ; 241.411,103.759 ccw(c241.411,104.413) 241.873,103.951 cw(c241.411,104.413) 241.411,103.759 ; 241.411,103.759 cw(c241.411,103.105) 241.873,103.567 ccw(c241.411,103.105) 241.411,103.759 ; 242.24,103.105 ccw(c241.586,103.105) 242.048,103.567 cw(c241.586,103.105) 242.24,103.105 ; 242.24,103.105 cw(c242.894,103.105) 242.431,103.567 ccw(c242.894,103.105) 242.24,103.105 ; 243.069,103.759 ccw(c243.069,103.105) 242.606,103.567 cw(c243.069,103.105) 243.069,103.759 ; 243.069,103.759 cw(c243.069,104.413) 242.606,103.951 ccw(c243.069,104.413) 243.069,103.759 ; 264.24,97.879 ccw(c263.596,97.879) 264.051,98.334 cw(c263.596,97.879) 264.24,97.879 ; 264.24,97.879 cw(c264.884,97.879) 264.429,98.334 ccw(c264.884,97.879) 264.24,97.879 ; 264.24,101.325 ccw(c264.884,101.325) 264.429,100.87 cw(c264.884,101.325) 264.24,101.325 ; 264.24,101.325 cw(c263.596,101.325) 264.051,100.87 ccw(c263.596,101.325) 264.24,101.325 ; v1@230.436,66.758 ccw(c231.189,67.511) 231.189,66.446 cw(c231.189,67.511) v1@230.436,66.758 ; C14.1@242.24,103.52 ccw(c243.652,103.52) 242.653,102.522 cw(c243.652,103.52) C14.1@242.24,103.52 ; v1@255.314,97.619 ccw(c254.398,98.535) 255.693,98.535 cw(c254.398,98.535) v1@255.314,97.619 ; v1@258.859,103.258 ccw(c259.305,103.705) 259.305,103.073 cw(c259.305,103.705) v1@258.859,103.258 ; 263.126,99.797 cw(c263.126,98.488) 264.051,99.413 ccw(c263.126,98.488) 263.126,99.797 ; 273.875,63.116 cw(c274.984,63.116) 274.2,63.899 ccw(c274.984,63.116) 273.875,63.116 ; 273.875,63.4 cw(c274.417,63.4) 274.187,63.89 ccw(c274.417,63.4) 273.875,63.4 ; v1@273.921,58.783 ccw(c274.846,59.708) 274.846,58.399 cw(c274.846,59.708) v1@273.921,58.783
+5V: C7.1 C23.1 D4.4 R6.2 R16.2 U3.8 U4.20 USB.1 | length 69.4
  Top Layer w0.2: 245.325,99.48 U4.20@245.325,99.9
  Top Layer w0.203: 245.516,99.324 cw(c245.543,99.112) v1@245.753,99.151 ; 245.593,99.212 245.325,99.48 ; 245.325,99.48 cw(c245.412,99.566) 245.324,99.651 ccw(c245.412,99.566) 245.325,99.48 ; 245.325,99.48 ccw(c245.681,99.835) 245.873,99.37 cw(c245.681,99.835) 245.325,99.48 ; U4.20@245.324,99.65 ccw(c245.731,99.65) 245.443,99.362 cw(c245.731,99.65) U4.20@245.324,99.65 ; 245.541,99.264 ccw(c245.807,99.53) 245.95,99.183 cw(c245.807,99.53) 245.541,99.264
  Top Layer w0.254: 231.14,98.4 231.15,98.389 U3.8@231.699,98.389 ; v1(245.948,99.187) 245.847,99.187 245.821,99.212 245.593,99.212 ; 245.593,99.212 ccw(c245.593,99.542) 245.826,99.309 cw(c245.593,99.542) 245.593,99.212 ; 245.593,99.212 cw(c245.593,98.968) 245.801,99.096 ccw(c245.593,98.968) 245.593,99.212
  Top Layer w0.305: C23.1@230.607,98.45 231.089,98.45 231.14,98.4 ; 230.987,98.45 ccw(c230.987,98.07) 230.718,98.339 cw(c230.987,98.07) 230.987,98.45 ; 230.987,98.45 cw(c230.987,98.831) 230.718,98.562 ccw(c230.987,98.831) 230.987,98.45
  Top Layer w0.381: USB.1@234.691,105.275 234.691,106.481
  Top Layer w0.508: v1(230.327,105.435) 230.327,105.816 231.013,106.502 236.169,106.502 236.677,105.994 236.677,102.54 236.271,102.133 236.144,102.133 235.758,101.747 D4.4@235.758,101.092 v1(236.576,101.092) ; v1(230.353,99.517) 230.353,99.466 230.607,99.212 C23.1@230.607,98.45 ; v1(245.313,93.142) 245.313,92.812 ; R6.2@246.108,92.507 245.618,92.507 ; 245.313,92.812 ccw(c245.964,93.462) 246.101,92.552 cw(c245.964,93.462) 245.313,92.812 ; 245.313,92.812 245.618,92.507 ; 245.618,92.507 cw(c246.243,93.132) 245.359,93.141 ccw(c246.243,93.132) 245.618,92.507 ; v1@230.32,99.485 cw(c229.628,98.793) 230.607,98.793 ccw(c229.628,98.793) v1@230.32,99.485 ; v1@230.34,99.473 cw(c230.24,99.12) 230.607,99.12 ccw(c230.24,99.12) v1@230.34,99.473 ; D4.4@235.804,101.442 cw(c236.652,101.442) 236.052,102.042 ccw(c236.652,101.442) D4.4@235.804,101.442
  Bottom Layer w0.305: v1(245.948,99.187) 246.431,99.187 246.685,99.441 246.685,100.381 C7.1@246.659,100.406 ; 246.305,99.187 ccw(c246.305,98.831) 246.053,99.083 cw(c246.305,98.831) 246.305,99.187 ; 246.305,99.187 cw(c246.305,99.543) 246.053,99.291 ccw(c246.305,99.543) 246.305,99.187 ; C7.1@246.396,100.143 cw(c245.699,99.445) 246.685,99.445 ccw(c245.699,99.445) C7.1@246.396,100.143 ; 246.685,99.568 cw(c247.498,99.568) 246.923,100.143 ccw(c247.498,99.568) 246.685,99.568
  Bottom Layer w0.508: v1@230.332,105.431 v1(230.327,105.435) 230.327,99.847 230.353,99.822 v1(230.353,99.517) ; v1(236.576,101.092) 238.735,98.933 ; 238.785,98.933 242.011,98.933 242.748,98.196 R16.2@243.212,98.196 ; 243.212,97.808 R16.2@243.212,98.196 ; v1(245.313,93.142) 245.313,96.799 244.831,97.282 243.738,97.282 243.256,97.765 ; C7.1@246.659,100.406 245.745,100.406 245.237,99.898 243.865,99.898 243.238,99.27 243.212,99.27 R16.2@243.212,98.196 ; 243.256,97.765 cw(c243.461,97.97) 243.246,98.165 ccw(c243.461,97.97) 243.256,97.765 ; 245.83,100.406 ccw(c245.83,101.06) 246.293,100.598 cw(c245.83,101.06) 245.83,100.406 ; 245.83,100.406 cw(c245.83,99.752) 246.293,100.215 ccw(c245.83,99.752) 245.83,100.406 ; 242.341,98.603 ccw(c243.212,99.475) 243.212,98.242 cw(c243.212,99.475) 242.341,98.603 ; R16.2@243.258,98.196 ccw(c244.306,98.196) 243.565,97.455 cw(c244.306,98.196) R16.2@243.258,98.196
ADS_START: U1A.23 U1B.23 U1C.23 U1D.23 U2.7 | length 81.4
  Top Layer w0.254: U1D.23@234.9,78.139 234.9,77.164 v1(235.077,76.987) ; v1(248.243,76.87) 248.25,76.87 U1C.23@248.25,78.1 ; U2.7@257.709,85.107 cw(c257.572,84.87) 257.837,84.941 ; U2.7@257.733,85.449 257.733,84.862 v1(258.267,84.328) ; 257.902,84.732 cw(c257.705,84.392) v1@258.095,84.348 ; 259.664,82.677 v1(259.664,83.972) ; 259.715,82.626 261.341,81.001 261.341,79.604 261.75,79.194 U1B.23@261.75,78.1 261.75,76.864 v1(261.747,76.86) ; U1A.23@275.522,77.533 cw(c275.203,77.337) 275.565,77.24 ; v1(275.59,76.937) 275.606,76.952 U1A.23@275.606,78.109 ; 234.9,77.378 ccw(c234.664,77.378) 234.831,77.545 cw(c234.664,77.378) 234.9,77.378 ; 234.9,77.378 cw(c235.137,77.378) 234.97,77.545 ccw(c235.137,77.378) 234.9,77.378 ; 248.25,77.338 ccw(c248.014,77.338) 248.181,77.506 cw(c248.014,77.338) 248.25,77.338 ; 248.25,77.338 cw(c248.487,77.338) 248.32,77.506 ccw(c248.487,77.338) 248.25,77.338 ; 257.869,84.835 ccw(c258.501,85.199) v1@258.312,84.495 ; 257.869,84.835 ccw(c258.501,85.199) v1@258.312,84.495 ; 257.869,84.835 ccw(c258.501,85.199) v1@258.312,84.495 ; 257.972,84.623 ccw(c258.267,84.919) 258.267,84.501 cw(c258.267,84.919) 257.972,84.623 ; 257.972,84.623 cw(c257.677,84.328) 258.094,84.328 ccw(c257.677,84.328) 257.972,84.623 ; 257.992,84.623 ccw(c258.21,84.749) v1@258.244,84.499 ; 257.992,84.623 ccw(c258.21,84.749) v1@258.244,84.499 ; 257.992,84.623 ccw(c258.21,84.749) v1@258.244,84.499 ; 259.664,83.555 ccw(c259.247,83.555) 259.542,83.85 cw(c259.247,83.555) 259.664,83.555 ; 259.664,83.555 cw(c260.082,83.555) 259.787,83.85 ccw(c260.082,83.555) 259.664,83.555 ; 261.75,77.338 ccw(c261.514,77.338) 261.681,77.506 cw(c261.514,77.338) 261.75,77.338 ; 261.75,77.338 cw(c261.987,77.338) 261.82,77.506 ccw(c261.987,77.338) 261.75,77.338 ; 261.75,78.862 ccw(c261.987,78.862) 261.82,78.694 cw(c261.987,78.862) 261.75,78.862 ; 261.75,78.862 cw(c261.514,78.862) 261.681,78.694 ccw(c261.514,78.862) 261.75,78.862 ; 275.606,77.348 ccw(c275.369,77.348) 275.536,77.515 cw(c275.369,77.348) 275.606,77.348 ; 275.606,77.348 cw(c275.842,77.348) 275.675,77.515 ccw(c275.842,77.348) 275.606,77.348 ; v1@248.121,76.992 ccw(c247.809,77.304) 248.25,77.304 cw(c247.809,77.304) v1@248.121,76.992 ; 248.25,77.27 ccw(c248.644,77.27) 248.366,76.992 cw(c248.644,77.27) 248.25,77.27 ; U2.7@257.781,85.149 ccw(c258.589,85.149) 258.018,84.577 cw(c258.589,85.149) U2.7@257.781,85.149 ; v1@261.625,76.983 ccw(c261.321,77.286) 261.75,77.286 cw(c261.321,77.286) v1@261.625,76.983 ; 261.75,77.27 ccw(c262.156,77.27) 261.869,76.983 cw(c262.156,77.27) 261.75,77.27 ; v1@275.468,77.059 ccw(c275.135,77.392) 275.606,77.392 cw(c275.135,77.392) v1@275.468,77.059 ; 275.606,77.317 ccw(c275.97,77.317) 275.712,77.059 cw(c275.97,77.317) 275.606,77.317
  Bottom Layer w0.254: v1(235.077,76.987) 235.204,76.86 v1@248.488,76.86 ; v1@248.361,76.86 v1@248.488,76.86 ; v1(258.267,84.328) 259.309,84.328 v1(259.664,83.972) ; v1@261.569,76.86 261.29,76.86 ; v1@261.976,76.86 262.255,76.86 ; v1(275.59,76.937) 275.596,76.931 275.596,76.917 275.539,76.86 262.255,76.86 ; v1@248.488,76.86 261.29,76.86 ; 258.685,84.328 ccw(c258.685,83.91) 258.39,84.206 cw(c258.685,83.91) 258.685,84.328 ; 258.685,84.328 cw(c258.685,84.746) 258.39,84.45 ccw(c258.685,84.746) 258.685,84.328 ; 259.369,84.268 ccw(c259.664,84.563) 259.664,84.145 cw(c259.664,84.563) 259.369,84.268 ; 259.369,84.268 cw(c259.074,83.972) 259.491,83.972 ccw(c259.074,83.972) 259.369,84.268 ; 261.29,76.86 v1(261.747,76.86) 262.255,76.86 ; 261.329,76.86 ccw(c261.329,77.278) v1@261.625,76.983 ; 261.329,76.86 cw(c261.329,76.443) v1@261.625,76.738 ; 261.329,76.86 ccw(c261.329,77.278) v1@261.625,76.983 ; 261.329,76.86 cw(c261.329,76.443) v1@261.625,76.738 ; 261.329,76.86 ccw(c261.329,77.278) v1@261.625,76.983 ; 261.329,76.86 cw(c261.329,76.443) v1@261.625,76.738 ; 261.329,76.86 ccw(c261.329,77.278) v1@261.625,76.983 ; 261.329,76.86 cw(c261.329,76.443) v1@261.625,76.738 ; v1@261.869,76.738 cw(c262.165,76.443) 262.165,76.86 ; v1@261.869,76.738 cw(c262.165,76.443) 262.165,76.86 ; v1@261.869,76.738 cw(c262.165,76.443) 262.165,76.86 ; v1@261.869,76.738 cw(c262.165,76.443) 262.165,76.86 ; v1@261.869,76.983 ccw(c262.165,77.278) 262.165,76.86 ; v1@261.869,76.983 ccw(c262.165,77.278) 262.165,76.86 ; v1@261.869,76.983 ccw(c262.165,77.278) 262.165,76.86 ; v1@261.869,76.983 ccw(c262.165,77.278) 262.165,76.86 ; 247.804,76.86 ccw(c247.804,77.309) 248.121,76.992 cw(c247.804,77.309) 247.804,76.86 ; 247.848,76.86 cw(c247.848,76.474) 248.121,76.747 ccw(c247.848,76.474) 247.848,76.86 ; v1@248.366,76.747 cw(c248.639,76.474) 248.639,76.86 ccw(c248.639,76.474) v1@248.366,76.747 ; v1@248.366,76.992 ccw(c248.683,77.309) 248.683,76.86 cw(c248.683,77.309) v1@248.366,76.992